# Altium PCB BS5T2MBoard.PcbDoc
Units mil, origin at the board's own origin, x right, y up, seen from the top; angles counter-clockwise.
Board outline 700 x 1010 mil, 2 copper layers (Top Layer, Bottom Layer); 9 components, 5 nets, 23 pads, 0 vias.
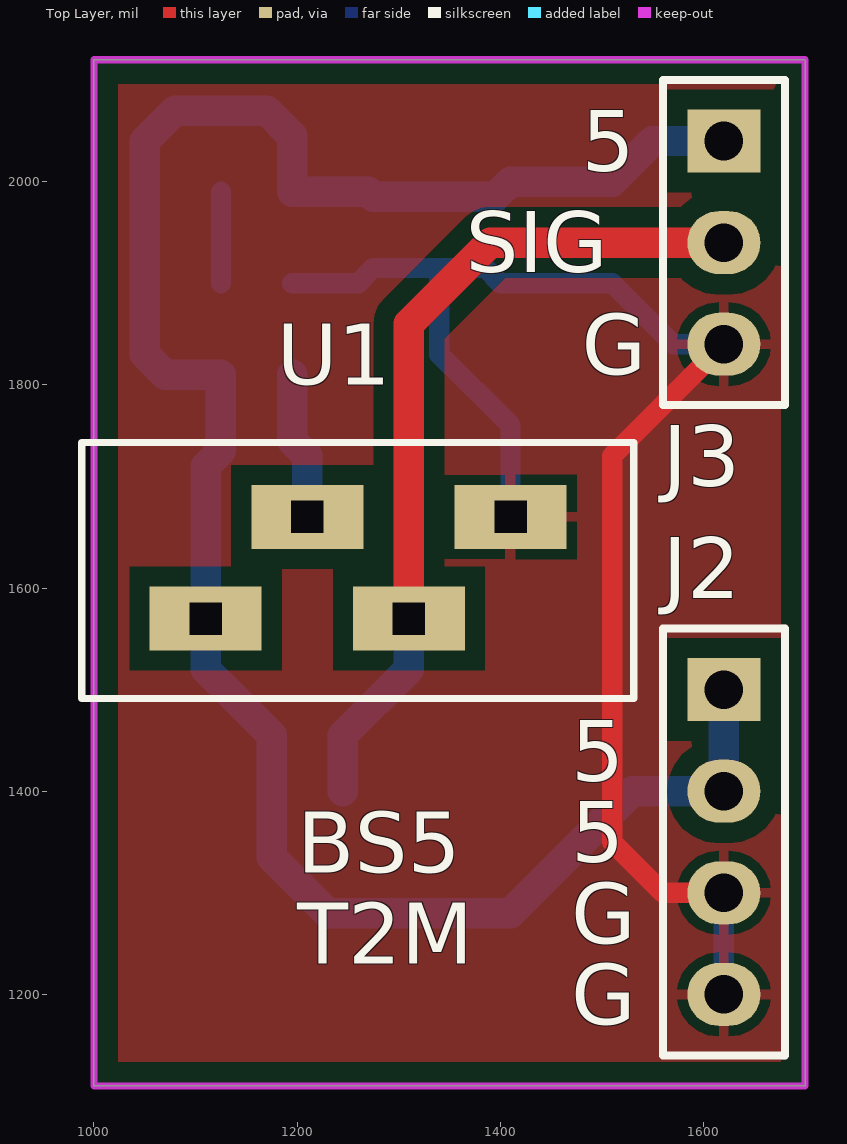
[diagram p0: Top Layer view]
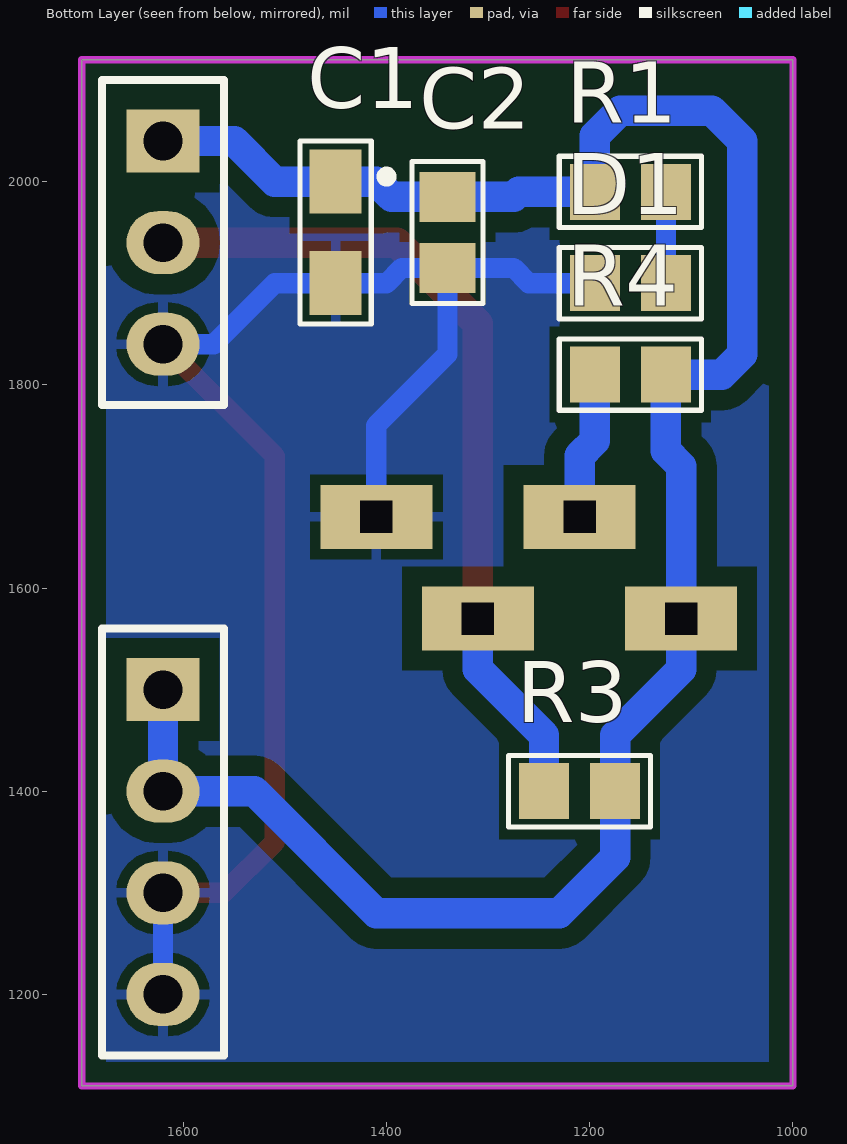
[diagram p1: Bottom Layer view, seen from below]
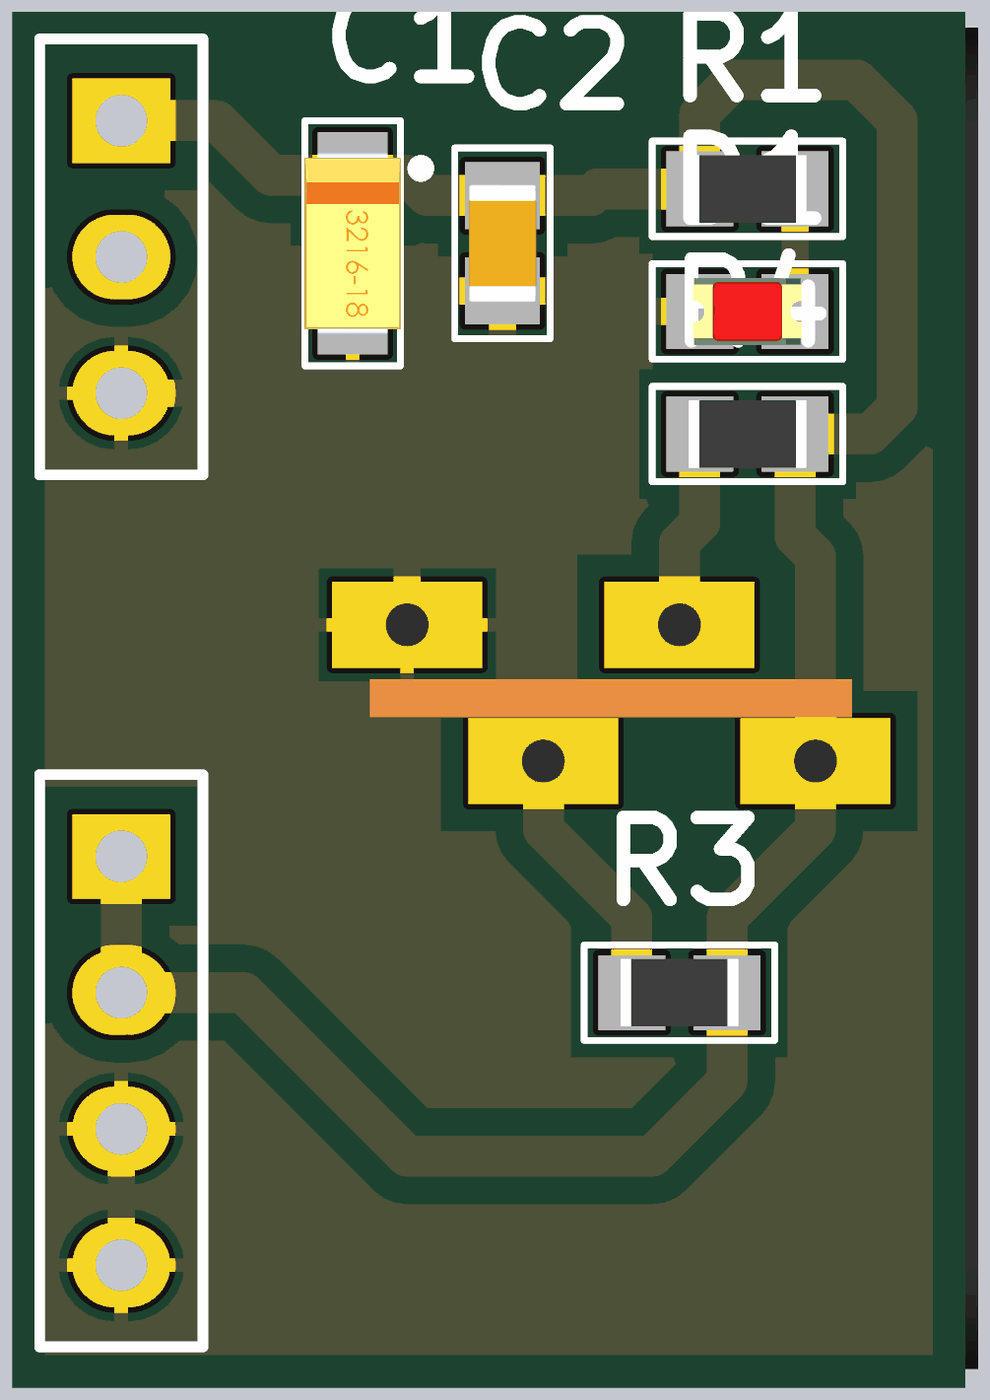
[diagram p2: 3D render of the assembled board from below, using the file's embedded part models]

## Layer stack, top to bottom
Top Solder: solder mask 0.4, Solder Resist, Dk 3.5
Top Layer: signal copper 1.4
Dielectric 1: dielectric 12.6, FR-4, Dk 4.8
Bottom Layer: signal copper 1.4
Bottom Solder: solder mask 0.4, Solder Resist, Dk 3.5

## Board outline
1000,1110 1000,2120 1700,2120 1700,1110

## Design rules (kind name [scope] priority, off if disabled: settings)
Clearance Clearance_2 [InNamedPolygon('Top Layer - GND')] p1: gap=20
Clearance Clearance_1 [InNamedPolygon('Bot Layer - GND')] p2: gap=20
Clearance [All] p3: gap=12
MinimumSolderMaskSliver [All] p1 off: minsoldermaskwidth=10
PolygonConnect [All] p1: connectstyle=Relief reliefconductorwidth=10 reliefentries=4 polygonreliefangle="90 Angle" airgapwidth=10
RoutingVias [All] p1: holewidth=24 width=40 viastyle="Through Hole" minholewidth=24 minwidth=40 maxholewidth=24 maxwidth=40
SilkToSilkClearance [All] p1 off: silktosilkclearance=10
SilkToSolderMaskClearance [IsPad] p1 off: minsilkscreentomaskgap=10 clearancetoexposedcopper=TRUE
SolderMaskExpansion [All] p1: expansion=4
Width [All] p1: maxlimit=50 minlimit=10 preferedwidth=20
27 further rules are at their usual default settings.

## Components (designator, comment, footprint, x,y, rotation, side; value= is the part's Value field where it differs from the comment)
C1 "Cap Pol" "Tantalum Size A" 1450,1950 r270 bottom
C2 "Cap Non Pol" C0805 1340,1950 r270 bottom
D1 "LED" D0805 1160,1900 r0 bottom
J2 "Header 1x4" "Header 1x4 Oval" 1620,1350 r270 top
J3 "Header 1x3" "Header 1x3 Oval" 1620,1940 r270 top
R1 "Resistor" R0805 1160,1990 r180 bottom
R3 "Resistor" R0805 1210,1400 r180 bottom
R4 "Resistor" R0805 1160,1810 r0 bottom
U1 "BS5-T2M" BS5-T2M 1110,1570 r0 top

## Footprints (in the part's own frame and the unit in brackets; to place one, negate y for a bottom-side part, rotate by r counter-clockwise, add the part's x,y. Pads: shape width x height; smd on the part's side, far side on the other; paste and mask are expansions set on the pad)
BS5-T2M [mm] "Photo Interrupt - 5mm"
  rect 2.8x1.6 hole 0.8 square: 1(0,0) 2(2.54,2.54) 3(5.08,0) 4(7.62,2.54)
  silkscreen extent -3.1,-2 10.7,4.4, body extent -3.03,-11.33 10.67,13.67, height 22.66
C0805 [mm] "Chip Capacitor, 2-Leads, Body 2.00x1.25mm"
  rect 1.25x1.4 smd: 1(-0.889,0) 2(0.889,0)
  silkscreen extent -1.78,-0.89 1.78,0.89, body extent -1.1,-0.63 1.1,0.63, height 0.6
D0805 [mm]
  rect 1.25x1.4 smd: 1(-0.889,0) 2(0.889,0)
  silkscreen extent -1.78,-0.89 1.78,0.89, body extent -1.01,-0.62 1.01,0.62, height 1.1
"Header 1x3 Oval" [mil] "2.54mm Single Male Pin Header"
  rect 62x72 hole 38: 1(-100,0)
  oval 62x72 hole 38: 2(0,0) 3(100,0)
  silkscreen extent -160,-60 160,60
"Header 1x4 Oval" [mil] "2.54mm Single Male Pin Header"
  rect 62x72 hole 38: 1(-150,0)
  oval 62x72 hole 38: 2(-50,0) 3(50,0) 4(150,0)
  silkscreen extent -210,-60 210,60
R0805 [mm]
  rect 1.25x1.4 smd: 1(-0.889,0) 2(0.889,0)
  silkscreen extent -1.78,-0.89 1.78,0.89, body extent -1.1,-0.63 1.1,0.63, height 0.6
"Tantalum Size A" [mm]
  rect 1.6x1.3 smd: 1(-1.27,0) 2(1.27,0)
  silkscreen extent -2.29,-0.89 2.29,1.39, body extent -1.7,-0.9 1.7,0.9, height 1.7

## Part data
C1: "Polarised Capacitor"
C2: "Non Polarised Capacitor"
J2 J3: "2.54mm Single Male/Female Pin Header"
U1: "Opto Interrupter, Sensing Distance 5mm"

## Nets (pads, with @x,y where several pads share a name; then routed paths per layer and width w, separated by ;. In a path a pad name is that pad's centre, name@x,y a point inside that pad or via, vN(x,y) a via of type N, cw(c..) or ccw(c..) an arc to the next point about the centre after c; other vN are vias at no path point)
5V: C1.1 C2.1 J2.1 J2.2 J3.1 R1.1 R3.2 R4.1 U1.1 | length 2091.5
  Bottom Layer w30: J2.1 J2.2 1530,1400 1410,1280 1230,1280 1175,1335 R3.2 1175,1455 1110,1520 U1.1 1110,1720 1125,1735 R4.1 1070,1810 1050,1830 1050,2040 1080,2070 1170,2070 1195,2045 R1.1 1270,1990 1275,1985 C2.1 1395,1985 1410,2000 C1.1 1510,2000 1550,2040 J3.1
GND: C1.2 C2.2 D1.2 J2.3 J2.4 J3.3 U1.4 | length 1502.5
  Top Layer w20: J2.3 1560,1300 1510,1350 1510,1730 J3.3
  Bottom Layer w20: D1.2 1260,1900 1275,1915 C2.2 ; U1.4 1410,1760 1340,1830 C2.2 ; J2.4 J2.3 ; J3.3 1570,1840 1510,1900 C1.2 1400,1900 1385,1915 C2.2
NetD1_1: D1.1 R1.2 | length 90
  Bottom Layer w20: D1.1 R1.2
NetR4_2: R4.2 U1.2 | length 146.2
  Bottom Layer w30: R4.2 1195,1745 1210,1730 U1.2
OUT: J3.2 R3.1 U1.3 | length 830.1
  Top Layer w30: U1.3 1310,1860 1390,1940 J3.2
  Bottom Layer w30: R3.1 1245,1455 1310,1520 U1.3

## Polygon pours and split planes (outlines as drawn)
GND on Bottom Layer "Bot Layer - GND" (solid, remove dead copper, pour order 0): 1000,2120 1700,2120 1700,1110 1000,1110
GND on Top Layer "Top Layer - GND" (solid, remove dead copper, pour order 2): 1000,2120 1700,2120 1700,1110 1000,1110

## Keep-outs
Keep-Out Layer:
  the board outline again, w7

## Silkscreen, mask and mechanical layers (free items; w line width, h text height)
Top Overlay:
  text "5" at 1480,2010 h60
  text "SIG" at 1365.8,1910.67 h60
  text "G" at 1480,1810 h60
  text "5" at 1470,1410 h60
  text "5" at 1470,1330 h60
  text "G" at 1470,1250 h60
  text "BS5 / T2M" at 1200,1230 h60
  text "G" at 1470,1170 h60